# Altium PCB rs485_pcb.PcbDoc
Units mm, origin at the board's own origin, x right, y up, seen from the top; angles counter-clockwise.
Board outline 175 x 76 mm, 4 copper layers (Top Layer, GND, POWER, Bottom Layer), stack 1.54 mm thick; 49 components, 32 nets, 200 pads, 28 vias.
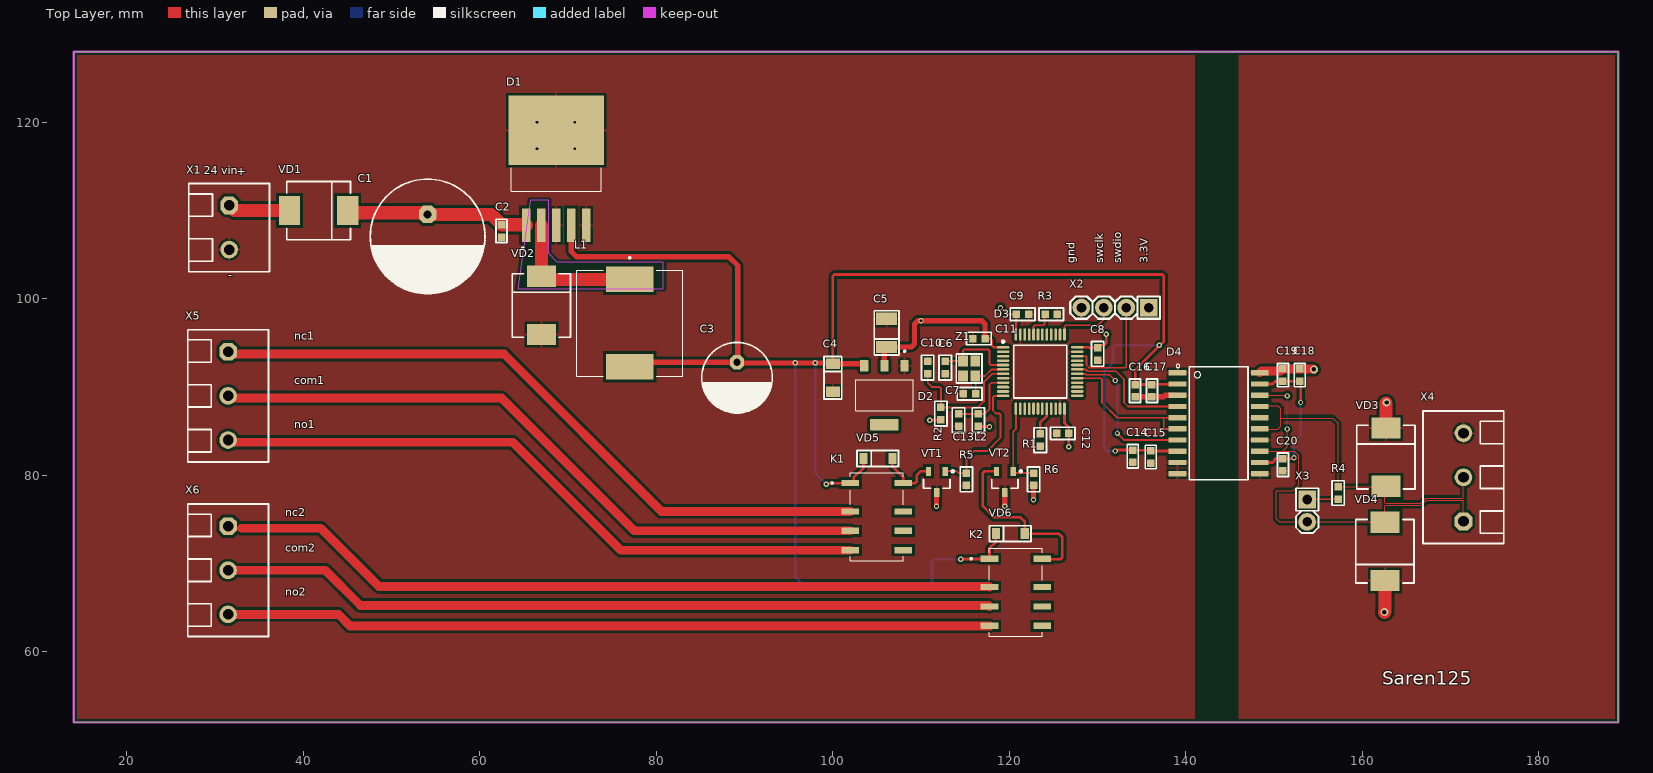
[diagram p0: Top Layer view]
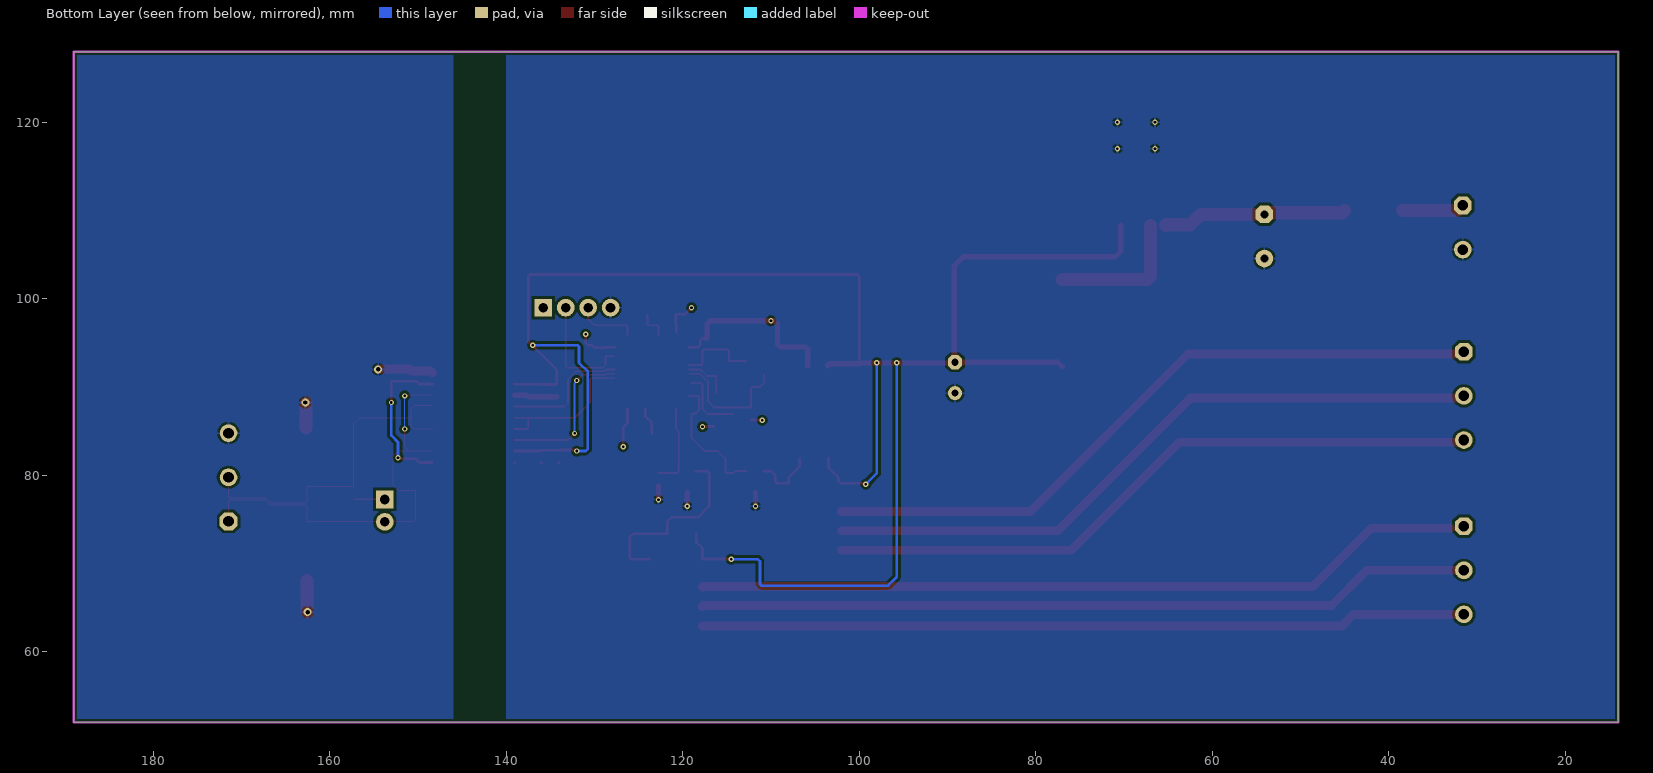
[diagram p1: Bottom Layer view, seen from below]
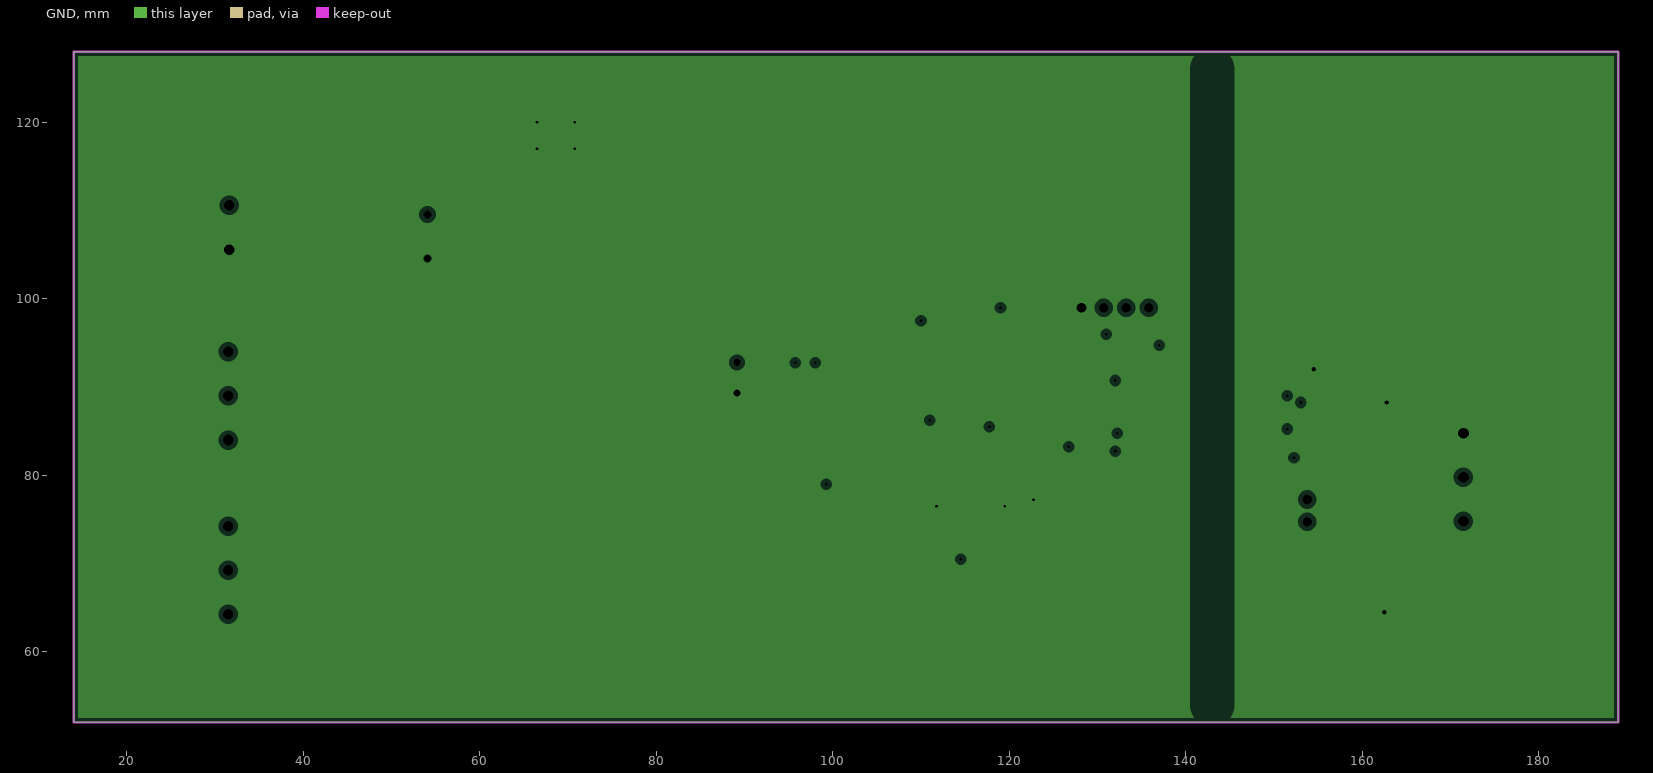
[diagram p2: GND, clearances drawn from the general rule]
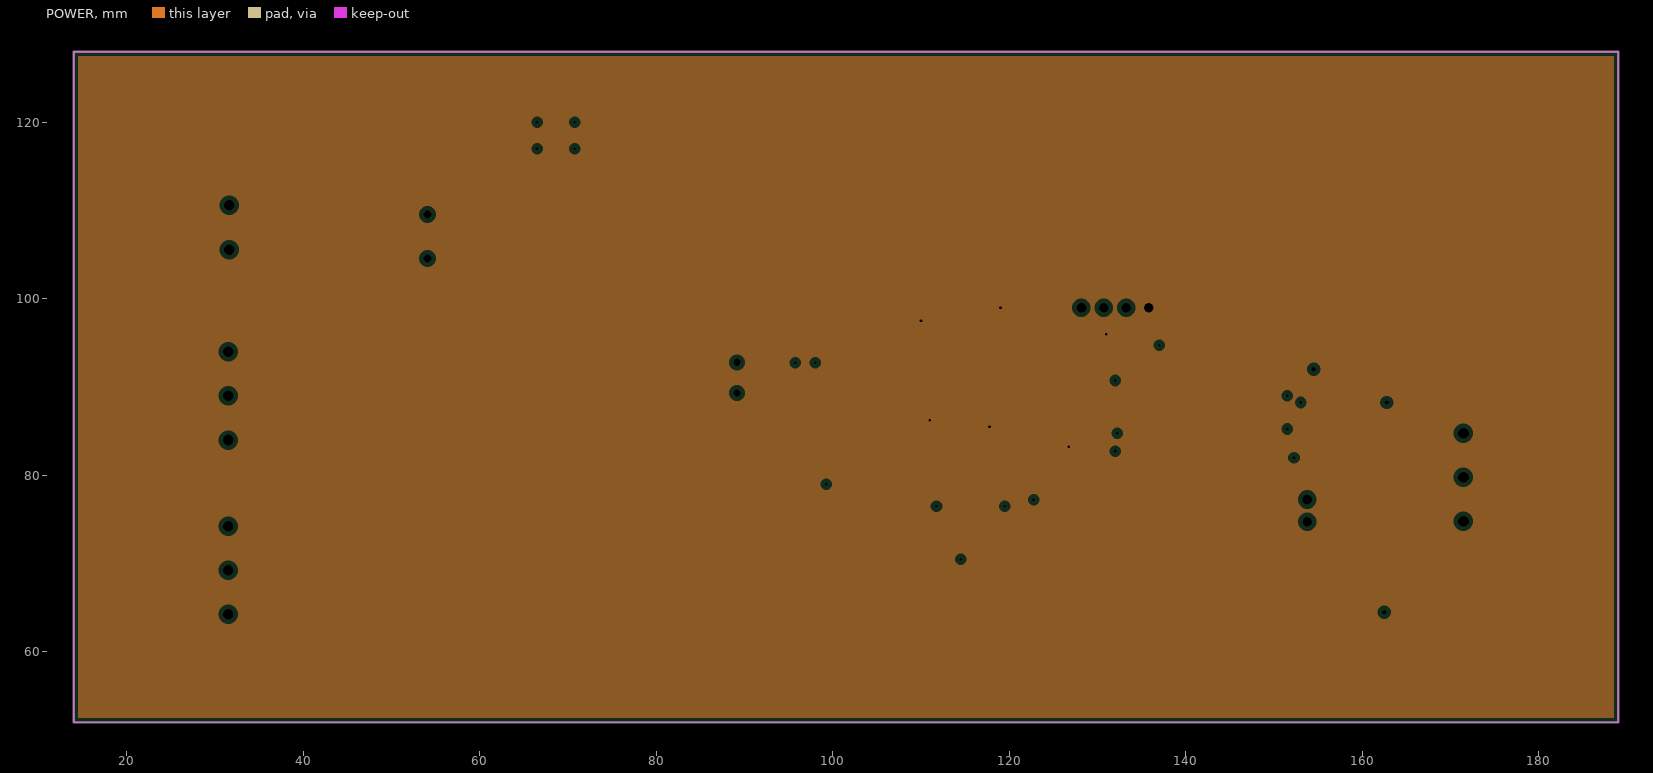
[diagram p3: POWER, clearances drawn from the general rule]
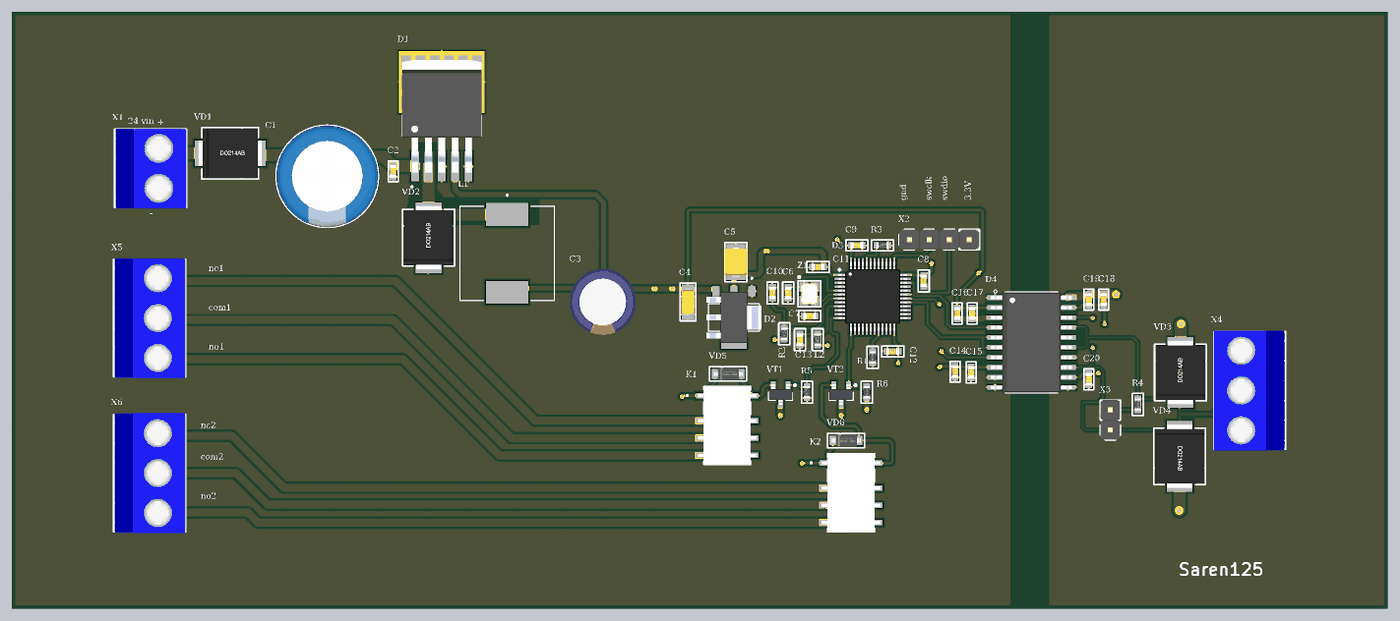
[diagram p4: 3D render of the assembled board from above, using the file's embedded part models]

## Layer stack, top to bottom
Top Solder: solder mask 0.0102, Solder Resist, Dk 3.5
Top Layer: signal copper 0.035
Dielectric 2: prepreg 0.2, PP-006, Dk 4.1
GND: plane copper 0.035, net (Multiple Nets)
Dielectric 1: dielectric 1, FR-4, Dk 4.8
POWER: plane copper 0.035, net +3.3V
Dielectric 3: prepreg 0.2, PP-006, Dk 4.1
Bottom Layer: signal copper 0.035
Bottom Solder: solder mask 0.0102, Solder Resist, Dk 3.5

## Board outline
14,52 14,128 189,128 189,52

## Design rules (kind name [scope] priority, off if disabled: settings)
Clearance Clearance_3 [InPolygon] p1: gap=0.3 ignorepadtopadclearanceinfootprint=FALSE
Clearance Clearance_2 [InNetClass('SIGNAL')] p2: gap=0.2 ignorepadtopadclearanceinfootprint=FALSE
Clearance Clearance_1 [InNetClass('POWER_DIGITAL')] p3: gap=0.2 ignorepadtopadclearanceinfootprint=FALSE
Clearance [InNetClass('POWER_24V_RELAY')] p4: gap=0.4 ignorepadtopadclearanceinfootprint=FALSE
DiffPairsRouting [InDifferentialPair('RS_485')] p1: maxlimit=0.127 minlimit=0.127 mostfreqgap=0.127 toplayer_minwidth=0.105 toplayer_maxwidth=0.105 toplayer_prefwidth=0.105 bottomlayer_minwidth=0.105 bottomlayer_maxwidth=0.105 bottomlayer_prefwidth=0.105 impedanceprofiledriven=TRUE impedanceprofileid={13D60385-229B-4DF7-BB78-969C6A2D73E0} impedanceprofilevalue=120.000000 maxuncoupledlength=12.7
MinimumSolderMaskSliver [All] p1: minsoldermaskwidth=0.1
PlaneClearance [All] p1: clearance=0.508
PlaneConnect [All] p1: planeconnectstyle=Relief reliefexpansion=0.508 reliefentries=4 reliefconductorwidth=0.254 reliefairgap=0.254
PolygonConnect [All] p1: connectstyle=Relief reliefconductorwidth=0.254 reliefentries=4 polygonreliefangle="90 Angle" airgapwidth=0.254
RoutingVias RoutingVias_2 [InNetClass('SIGNAL')] p1: holewidth=0.3 width=0.6 viastyle="Through Hole" minholewidth=0.3 minwidth=0.6 maxholewidth=0.3 maxwidth=0.6
RoutingVias RoutingVias_1 [InNetClass('POWER_DIGITAL')] p2: holewidth=0.3 width=0.6 viastyle="Through Hole" minholewidth=0.3 minwidth=0.6 maxholewidth=0.3 maxwidth=0.6
RoutingVias [InNetClass('POWER_24V_RELAY')] p3: holewidth=0.5 width=0.9 viastyle="Through Hole" minholewidth=0.5 minwidth=0.9 maxholewidth=0.5 maxwidth=0.9
SilkToSolderMaskClearance [IsPad] p1: minsilkscreentomaskgap=0.1 clearancetoexposedcopper=TRUE
SolderMaskExpansion [All] p1: expansion=0.102 istentingtop=FALSE
Width Width_2 [InNetClass('POWER_24V_RELAY')] p1: maxlimit=1.5 minlimit=1 preferedwidth=1
Width Width_1 [InNetClass('SIGNAL')] p2: maxlimit=0.3 minlimit=0.2 preferedwidth=0.2
Width [InNetClass('POWER_DIGITAL')] p3: maxlimit=0.6 minlimit=0.3 preferedwidth=0.4
25 further rules are at their usual default settings.

## Classes and differential pairs
component class power: 3 C1 C2 C3 C4 C5 C6 C7 C8 C9 C10 C11 C12 C13 D2 D3 L1 L2 R1 R2 VD1 VD2 X1 X2 Z1
component class interface: C14 C15 C16 C17 C18 C19 C20 D4 K1 K2 R4 R5 R6 VD3 VD4 VD5 VD6 VT1 VT2 X3 X4 X5 X6
net class SIGNAL: MCU_RX MCU_TX NetD1_2 NetD3_20 NetD3_44 NetK1_8 NetK2_8 OSC_IN OSC_OUT RELAY1_CTRL RELAY2_CTRL RS_485_DIR RS_485_N RS_485_P SWCLK SWDIO VDDA
net class POWER_DIGITAL: +3.3V +5V GND V_ISO
net class POWER_24V_RELAY: +24V COM1 COM2 GND_ISO NC1 NC2 NetD1_2 NO1 NO2
differential pair RS_485: +RS_485_P -RS_485_N

## Components (designator, comment, footprint, x,y, rotation, side; value= is the part's Value field where it differs from the comment)
C1 "JRB1H681M05001300200000B" "CAP: D13C5H20" 54.102,107.061 r270 top value="680 uF"
C2 "Ceramic capacitor, 0.1μF, X7R, ±10%, 50V, 0603, -55...+125°C" "CAP: 0603" 62.484,107.696 r90 top value=0.1μF
C3 "JRB1E221M03500800120000B" "CAP: D8C3.5H12" 89.154,91.059 r270 top value=220μF
C4 "Tantalum capacitor, 10μF, 10V, ±10%, 2Ohm, case A (3216), -55...+125°C" "CAP: TANTAL-A" 100.008,91.059 r270 top value=10μF
C5 "Tantalum capacitor, 22μF, 10V, ±10%, 1.2Ohm, case B (3528), -55...+125°C" "CAP: TANTAL-B" 106.104,96.139 r90 top value=22μF
C6 "22pF" CH0603C 112.75,92.2 r90 top
C7 "22pF" CH0603C 115.5,89.25 r180 top
C8 "0.1 uF" CH0603C 130,93.75 r90 top
C9 "0.1 uF" CH0603C 121.5,98.25 r180 top
C10 "0.1 uF" CH0603C 110.75,92.2 r270 top
C11 "0.1 uF" CH0603C 116.55,95.5 r0 top
C12 "0.1 uF" CH0603C 126.054,84.75 r0 top
C13 "0.1 uF" CH0603C 114.25,86.25 r90 top
C14 "Ceramic capacitor, 0.1μF, X7R, ±10%, 16V, 0603, -55...+125°C" "CAP: 0603" 133.996,82.167 r90 top value=0.1μF
C15 "Ceramic capacitor, 0.1μF, X7R, ±10%, 16V, 0603, -55...+125°C" "CAP: 0603" 136.028,82.084 r90 top value=0.1μF
C16 "Ceramic capacitor, 0.01μF, X7R, ±10%, 16V, 0603, -55...+125°C" "CAP: 0603" 134.25,89.589 r90 top value=0.01μF
C17 "Ceramic capacitor, 0.01μF, X7R, ±10%, 16V, 0603, -55...+125°C" "CAP: 0603" 136.155,89.589 r90 top value=0.01μF
C18 "Ceramic capacitor, 10uF, X7R, ±10%, 16V, 0603, -55...+125°C" "CAP: 0603" 152.907,91.359 r270 top value=10uF
C19 "Ceramic capacitor, 0.1μF, X7R, ±10%, 16V, 0603, -55...+125°C" "CAP: 0603" 151.002,91.359 r270 top value=0.1μF
C20 "Ceramic capacitor, 0.1μF, X7R, ±10%, 16V, 0603, -55...+125°C" "CAP: 0603" 151.002,81.199 r90 top value=0.1μF
D1 "LM2596S-5.0" TO170P1524X483-6N 68.678,114.731 r90 top
D2 "AMS1117-3.3" SOT229P700X180-4N 105.85,89.07 r270 top
D3 "STM32F103C8T6" 48-LQFP 123.5,91.75 r0 top
D4 "ADM2587EBRWZ-REEL7" SOIC127P1032X265-20N 143.714,85.898 r0 top
K1 "IM03GR" RELAY_IM03GR 105,75.321 r0 top
K2 "IM03GR" RELAY_IM03GR 120.75,66.75 r0 top
L1 "SPRH127-470M" IND_SPRH127-470M 77,97.25 r270 top
L2 "" CH0603R 116.5,86.25 r90 top
R1 "10 кОм" CH0603R 123.5,84 r270 top
R2 "10 кОм" CH0603R 112.25,87 r270 top
R3 "10 кОм" CH0603R 124.754,98.25 r0 top
R4 "120 Om" CH0603R 157.25,78 r270 top
R5 "10 kOm" CH0603R 115.146,79.552 r90 top
R6 "10 kOm" CH0603R 122.75,79.552 r90 top
VD1 "SS34" SMC 41.75,110 r0 top
VD2 "SS34" SMC 67,99.25 r90 top
VD3 "SMCJ12CA" SMC 162.669,82.064 r90 top
VD4 "SMCJ12CA" SMC 162.563,71.396 r270 top
VD5 "1N4148W" SOD123 106.75,81.9 r180 top
VD6 "1N4148W" SOD123 121.75,73.4 r180 top
VT1 "2N7002" SOT23_132 111.791,79.25 r270 top
VT2 "2N7002" SOT23_132 119.5,79.25 r270 top
X1 "KLS2-300-5.00-02P-2S" "CON: 300-02P-5.0" 31.623,108.077 r270 top
X2 "DS-1021-1x4" "CON: PLS-4" 131.98,99 r180 top
X3 "Connector, 2pin, 2.54mm, 500VAC, 3A" "CON: PLS-2" 153.75,76 r270 top
X4 "KLS2-300-5.00-02P-2S" "CON: 300-03P-5.0" 171.453,79.778 r90 top
X5 "KLS2-300-5.00-02P-2S" "CON: 300-03P-5.0" 31.5,89 r270 top
X6 "KLS2-300-5.00-02P-2S" "CON: 300-03P-5.0" 31.5,69.25 r270 top
Z1 "8MHz" "OSC: 2520" 114.75,92.95 r270 top

## Footprints (in the part's own frame and the unit in brackets; to place one, negate y for a bottom-side part, rotate by r counter-clockwise, add the part's x,y. Pads: shape width x height; smd on the part's side, far side on the other; paste and mask are expansions set on the pad)
48-LQFP [mm] "QFP, 48-Leads, Body 7x7mm, Pitch 0.5mm, IPC Medium Density"
  oval 1.4x0.3 smd: 1(-4.2,2.75) 2(-4.2,2.25) 3(-4.2,1.75) 4(-4.2,1.25) 5(-4.2,0.75) 6(-4.2,0.25) 7(-4.2,-0.25) 8(-4.2,-0.75) 9(-4.2,-1.25) 10(-4.2,-1.75) 11(-4.2,-2.25) 12(-4.2,-2.75) 25(4.2,-2.75) 26(4.2,-2.25) 27(4.2,-1.75) 28(4.2,-1.25) 29(4.2,-0.75) 30(4.2,-0.25) 31(4.2,0.25) 32(4.2,0.75) 33(4.2,1.25) 34(4.2,1.75) 35(4.2,2.25) 36(4.2,2.75)
  round 0.5 on Mech1: 2(-4,4)
  oval 0.3x1.4 smd: 13(-2.75,-4.2) 14(-2.25,-4.2) 15(-1.75,-4.2) 16(-1.25,-4.2) 17(-0.75,-4.2) 18(-0.25,-4.2) 19(0.25,-4.2) 20(0.75,-4.2) 21(1.25,-4.2) 22(1.75,-4.2) 23(2.25,-4.2) 24(2.75,-4.2) 37(2.75,4.2) 38(2.25,4.2) 39(1.75,4.2) 40(1.25,4.2) 41(0.75,4.2) 42(0.25,4.2) 43(-0.25,4.2) 44(-0.75,4.2) 45(-1.25,4.2) 46(-1.75,4.2) 47(-2.25,4.2) 48(-2.75,4.2)
  silkscreen extent -4.32,-3 3,3.52, body extent -4.39,-4.39 4.39,4.39, height 1.55
"CAP: 0603" [mm]
  rect 0.85x0.85 smd: 1(-0.7,0) 2(0.7,0)
  silkscreen extent -1.33,-0.63 1.33,0.63, body extent -0.8,-0.4 0.8,0.4, height 0.3
"CAP: D8C3.5H12" [mm]
  oct 1.6x1.6 hole 0.8: 1(-1.75,0)
  round 1.6 hole 0.8: 2(1.75,0)
  silkscreen extent -4,-4 4,4, body extent -4.25,-4.25 4.25,4.25, height 13
"CAP: D13C5H20" [mm]
  oct 2x2 hole 0.9: 1(-2.5,0)
  round 2 hole 0.9: 2(2.5,0)
  silkscreen extent -6.5,-6.5 6.5,6.5, body extent -6.5,-6.5 6.5,6.5, height 25
"CAP: TANTAL-A" [mm]
  rect 1.2x1.6 smd: 1(-1.6,0) 2(1.6,0)
  silkscreen extent -2.4,-1 2.4,1, body extent -1.7,-0.84 1.7,0.84, height 1.71
"CAP: TANTAL-B" [mm]
  rect 1.4x2.4 smd: 1(-1.6,0) 2(1.6,0)
  silkscreen extent -2.5,-1.4 2.5,1.4, body extent -1.85,-1.46 1.85,1.47, height 2.03
CH0603C [mm] "Chip Capacitor, 2-Leads, Body 1,53x0,85mm, IPC Medium Density"
  rect 0.85x0.85 smd: 1(-0.7,0) 2(0.7,0)
  silkscreen extent -1.4,-0.7 1.4,0.7, body extent -0.8,-0.4 0.8,0.4, height 0.3
CH0603R [mm]
  rect 0.85x0.85 smd: 1(-0.7,0) 2(0.7,0)
  silkscreen extent -1.4,-0.7 1.4,0.7, body extent -0.8,-0.4 0.8,0.4, height 0.44
"CON: 300-02P-5.0" [mm] "2 pin 5.08mm screw connector"
  oct 2x2 hole 1.2: 1(-2.5,0)
  round 2 hole 1.2: 2(2.5,0)
  round 0.5 on Mech1: 13(-4.4,-3.9)
  silkscreen extent -5,-4.57 5,4.57, body extent -5.08,-4.44 5.08,4.56, height 12.5
"CON: 300-03P-5.0" [mm] "3 pin 5.08mm screw connector"
  oct 2x2 hole 1.2: 1(-5,0)
  round 2 hole 1.2: 2(0,0) 3(5,0)
  round 0.5 on Mech1: 11(-6.7,-3.7)
  silkscreen extent -7.5,-4.57 7.5,4.57, body extent -7.62,-4.44 7.62,4.56, height 12.5
"CON: PLS-2" [mm]
  rect 2x2 hole 1.1: 1(-1.27,0)
  round 2 hole 1.1: 2(1.27,0)
  silkscreen extent -2.54,-1.27 2.54,1.27, body extent -2.57,-1.28 2.51,1.26, height 8.54
"CON: PLS-4" [mm] "PLS-40 4 pin header"
  rect 2x2 hole 1.1: 1(-3.81,0)
  round 2 hole 1.1: 2(-1.27,0) 3(1.27,0) 4(3.81,0)
  silkscreen extent -5.08,-1.27 5.08,1.27, body extent -5.08,-1.27 5.08,1.27, height 8.54
IND_SPRH127-470M [mm]
  rect 2.9x5.4 smd paste+0 mask+0.102: 1(-4.95,0) 2(4.95,0)
  silkscreen extent -7.5,-6 6,6
"OSC: 2520" [mm]
  rect 1.2x1.1 smd: 1(0,0) 2(1.7,0) 3(1.7,1.4) 4(0,1.4)
  round 0.5 on Mech1: 5(-0.075,0.025)
  round 0.5 on Top Overlay: 6(-1.275,-0.6)
  silkscreen extent -0.8,-0.75 2.5,2.15, body extent -0.45,-0.35 2.15,1.75, height 0.55
RELAY_IM03GR [mm]
  rect 2x0.7 smd paste+0 mask+0.102: 1(-3,3.8) 2(-3,0.6) 3(-3,-1.6) 4(-3,-3.8) 5(3,-3.8) 6(3,-1.6) 7(3,0.6) 8(3,3.8)
  silkscreen extent -5.18,-5 3,5, body extent -3.75,-5 3.75,5, height 5.85
SMC [mm]
  rect 2.4x3.3 smd: 1(-3.3,0) 2(3.3,0)
  silkscreen extent -3.6,-3.3 3.6,3.3, body extent -4.06,-3.15 4.06,3.15, height 2.67
SOD123 [mm]
  rect 0.91x1.22 smd: 1(0,0) 2(3.275,0)
  round 0.5 on Mech1: 4(3,0.4)
  silkscreen extent -0.7,-0.9 4,0.9, body extent -0.25,-0.8 3.45,0.8, height 1.25
SOIC127P1032X265-20N [mm]
  rect 2x0.6 smd: 1(-4.65,5.715) 2(-4.65,4.445) 3(-4.65,3.175) 4(-4.65,1.905) 5(-4.65,0.635) 6(-4.65,-0.635) 7(-4.65,-1.905) 8(-4.65,-3.175) 9(-4.65,-4.445) 10(-4.65,-5.715) 11(4.65,-5.715) 12(4.65,-4.445) 13(4.65,-3.175) 14(4.65,-1.905) 15(4.65,-0.635) 16(4.65,0.635) 17(4.65,1.905) 18(4.65,3.175) 19(4.65,4.445) 20(4.65,5.715)
  silkscreen extent -4.8,-6.4 3.32,6.7, body extent -5.16,-6.4 5.16,6.4, height 2.65
SOT23_132 [mm] "SOT23, 3-Leads, Body 3,0x2,6mm (max), Pitch 0,95mm, IPC Medium Density"
  rect 1x0.6 smd: 1(-1.2,0.95) 2(-1.2,-0.95) 3(1.2,0)
  round 0.5 on Mech1: ""(-0.9,1.1)
  silkscreen extent -1.32,-1.5 0.7,1.92, body extent -1.32,-1.52 1.32,1.52, height 1.12
SOT229P700X180-4N [mm]
  rrect15% 1.31x0.93 smd: 1(-3.345,2.29) 2(-3.345,0) 3(-3.345,-2.29)
  rrect15% 1.31x3.24 smd: 4(3.345,0)
  silkscreen extent -5.1,-3.25 1.75,3.25, body extent -3.25,-3.5 3.25,3.5, height 1.8
TO170P1524X483-6N [mm]
  rect 3.79x0.99 smd: 1(-6.4,3.4) 2(-6.4,1.7) 3(-6.4,0) 4(-6.4,-1.7) 5(-6.4,-3.4)
  rect 7.88x10.84 smd paste-6: 6(4.35,0)
  silkscreen extent -9.1,-5.08 0.09,5.08, body extent -7.18,-5.08 7.18,5.08, height 4.65

## Part data
C1: library part Aluminium, Manufacturer=Wurth, Package="14x10x5 mm", PartNumber=860080475013, Temperature=-55...+105°C, Tolerance=±20%, TypeCapacitor="Aluminium capacitor", ValueManufacturerPartNumber="Aluminium capacitor, 680 uF, 50V, ±20%, 54mOhm, 14x10x5 mm, -55...+105°C", Voltage=50V, HelpURL=https://www.digikey.com/product-detail/en/wurth-electronics-inc/860080475013/732-9029-1-ND/5728972, Impedance=54mOhm
C2: library part Ceramic_0603, Manufacturer=Yageo, Package=0603, PartNumber=CC0603KRX7R7BB104, Temperature=-55...+125°C, Tolerance=±10%, TypeCapacitor="Ceramic capacitor", TypeDielectric=X7R, Voltage=50V, HelpURL=https://www.digikey.com/product-detail/en/yageo/CC0603KRX7R7BB104/311-1088-1-ND/302998, ValueManufacturerPartNumber="Ceramic capacitor, 0.1μF, X7R, ±10%, 50V, 0603, -55...+125°C"
C3: library part Aluminium, Manufacturer=Wurth, Package="14x10x5 mm", PartNumber=860080475013, Temperature=-55...+105°C, Tolerance=±20%, TypeCapacitor="Aluminium capacitor", ValueManufacturerPartNumber="Aluminium capacitor, 220μF, 25V, ±20%, 54mOhm, 14x10x5 mm, -55...+105°C", Voltage=25V, HelpURL=https://www.digikey.com/product-detail/en/wurth-electronics-inc/860080475013/732-9029-1-ND/5728972, Impedance=54mOhm
C4: library part Tantal_A, Manufacturer=AVX, Package="case A (3216)", PartNumber=F930J107KAAAJ6, Temperature=-55...+125°C, Tolerance=±10%, TypeCapacitor="Tantalum capacitor", TypeDielectric=X7R, Voltage=10V, HelpURL=https://www.digikey.com/product-detail/en/avx-corporation/F930J107KAAAJ6/478-12404-1-ND/9645231, Impedance=2Ohm, ValueManufacturerPartNumber="Tantalum capacitor, 10μF, 10V, ±10%, 2Ohm, case A (3216), -55...+125°C"
C5: library part Tantal_B, Manufacturer=AVX, Package="case B (3528)", PartNumber=F930J227KBA, Temperature=-55...+125°C, Tolerance=±10%, TypeCapacitor="Tantalum capacitor", TypeDielectric=X7R, Voltage=10V, HelpURL=https://www.digikey.com/product-detail/en/avx-corporation/F930J227KBA/478-8166-1-ND/4005570, Impedance=1.2Ohm, ValueManufacturerPartNumber="Tantalum capacitor, 22μF, 10V, ±10%, 1.2Ohm, case B (3528), -55...+125°C"
C6 C7 C8 C9 C10 C11 C12 C13: library part Capacitor
C14 C15 C16 C17 C18 C19 C20: library part Ceramic_0603, Manufacturer=Yageo, Package=0603, PartNumber=CC0603KRX7R7BB104, Temperature=-55...+125°C, Tolerance=±10%, TypeCapacitor="Ceramic capacitor", TypeDielectric=X7R, Voltage=16V, HelpURL=https://www.digikey.com/product-detail/en/yageo/CC0603KRX7R7BB104/311-1088-1-ND/302998
  C14 C15 C19 C20: ValueManufacturerPartNumber="Ceramic capacitor, 0.1μF, X7R, ±10%, 16V, 0603, -55...+125°C"
  C16 C17: ValueManufacturerPartNumber="Ceramic capacitor, 0.01μF, X7R, ±10%, 16V, 0603, -55...+125°C"
  C18: ValueManufacturerPartNumber="Ceramic capacitor, 10uF, X7R, ±10%, 16V, 0603, -55...+125°C"
D1: "SIMPLE SWITCHERÂ® 4.5V to 40V, 3A Low Component Count Step-Down Regulator", Package="TO-263-5 Texas Instruments", Check_prices=https://www.snapeda.com/parts/LM2596S-5.0/NOPB/Texas+Instruments/view-part/?ref=eda, MF="Texas Instruments", MP=LM2596S-5.0/NOPB, SnapEDA_Link=https://www.snapeda.com/parts/LM2596S-5.0/NOPB/Texas+Instruments/view-part/?ref=snap
D2: "Sot223/Pkg 1-Amp 3.3-Volt Low Drop Out Voltage Regulatator", Package="SOT-223 Seeed Technology", Check_prices=https://www.snapeda.com/parts/AMS1117-3.3/Advanced+Monolithic+Systems/view-part/?ref=eda, MF="Advanced Monolithic Systems", MP=AMS1117-3.3, SnapEDA_Link=https://www.snapeda.com/parts/AMS1117-3.3/Advanced+Monolithic+Systems/view-part/?ref=snap
D3: "Cortex-M3", Manufacturer="ST Microelectronics", ComponentKind=48-LQFP, HelpURL=https://www.digikey.com/product-detail/en/stmicroelectronics/STM32F103C8T6/497-6063-ND/1646338, Model=STM32F103C8T6
D4: "2.5 kV Signal and Power Isolated, Â±15 kV ESD Protected, Full/Half Duplex RS-485 Transceiver (500kbps)", Package="SOIC -20 Analog Devices", Check_prices=https://www.snapeda.com/parts/ADM2587EBRWZ-REEL7/Analog+Devices/view-part/?ref=eda, MF="Analog Devices", MP=ADM2587EBRWZ-REEL7, SnapEDA_Link=https://www.snapeda.com/parts/ADM2587EBRWZ-REEL7/Analog+Devices/view-part/?ref=snap
K1 K2: "Signal Relay 5VDC 2A DPDT( (10mm 7.5mm 5.65mm)) SMD Medical", Package=None, Check_prices=https://www.snapeda.com/parts/IM03GR/TE+Connectivity/view-part/?ref=eda, MF="TE Connectivity", MP=IM03GR, SnapEDA_Link=https://www.snapeda.com/parts/IM03GR/TE+Connectivity/view-part/?ref=snap
L1: Package=None, Availability=Unavailable, MF="{'manufacturer': u'CODACA'}", MP=SPRH127-470M, Price=None
L2: library part Bead
R1 R2 R3 R4 R5 R6: library part Resistor
VD1 VD2: library part "Diod Schottky"
VD3 VD4: library part TVS-diod
VD5 VD6: library part Diod
VT1 VT2: library part N-chanel, "Mosfet"
X1: library part 2-Connector
X2: library part 4-Connector
X3: library part PLS-2, CurrentMax=3A, Manufacturer=Connfly, VoltageMax=500VAC, CommentText=DS1021-1x2, HelpURL=https://www.chipdip.ru/product/pls-2, Multichannel=2pin, PartNumber=PLS-2, Pitch=2.54mm, TypeConnector=Connector, ValueManufacturerPartNumber="Connector, 2pin, 2.54mm, 500VAC, 3A"
X4 X5 X6: library part 3-Connector
Z1: library part Oscillator

## Via types
v1: diameter 0.6, hole 0.3, Top Layer to Bottom Layer, 25 vias
v2: diameter 0.9, hole 0.5, Top Layer to Bottom Layer, 3 vias

## Nets (pads, with @x,y where several pads share a name; then routed paths per layer and width w, separated by ;. In a path a pad name is that pad's centre, name@x,y a point inside that pad or via, vN(x,y) a via of type N, cw(c..) or ccw(c..) an arc to the next point about the centre after c; other vN are vias at no path point)
+3.3V: C5.1 C8.2 C9.2 C11.2 C12.2 D2.2 D3.1 D3.24 D3.36 D3.48 L2.1 R2.2 X2.1 | length 36
  Top Layer w0.3: v1(111,86.25) 111.025,86.275 112.225,86.275 R2.2 ; L2.1 116.525,85.525 117.725,85.525 v1(117.75,85.5) ; C11.2@117.5,95.5 117.824,95.5 118,95.324 118,94.75 118.25,94.5 D3.1 ; v1(119,99) 119.75,98.25 C9.2 120.8,97.262 120.75,97.212 D3.48@120.75,96.25 ; D3.24 126.25,87 126.25,85.924 126.724,85.449 126.724,84.78 C12.2 126.752,84.748 v1(126.75,83.25) v1(126.75,83.25) ; D3.36 128.962,94.5 129.012,94.45 C8.2 130.275,94.725 130.725,94.725 131,95 v1(131,96)
  Top Layer w0.6: D2.2 105.85,94.285 C5.1 108.899,94.539 109.25,94.89 109.25,97.149 109.601,97.5 v1(110,97.5) 116.899,97.5 117.25,97.149 C11.2
+5V: C3.1 C4.1 C14.2 C15.2 C16.2 C17.2 D1.4 D2.3 D4.2 D4.8 K1.1 K2.1 L1.2 VD5.2 VD6.2 | length 225.2
  Top Layer w0.3: v1(99.25,79) 99.331,79 99.452,79.121 K1.1 102.167,79.121 102.367,79.321 102.367,79.745 103.475,80.853 VD5.2 ; C4.1@100,92.734 100,102.574 100.176,102.75 137.324,102.75 137.5,102.574 137.5,95.176 137.037,94.713 134.25,91.926 C16.2 C17.2 136.182,90.316 139.037,90.316 D4.2 ; v1(114.5,70.5) 114.525,70.525 117.725,70.525 K2.1 117.75,71.75 118.475,72.475 VD6.2 ; v1(132,82.75) 132.081,82.75 132.198,82.867 C14.2 134.037,82.826 135.986,82.826 C15.2 136.058,82.753 139.033,82.753 D4.8
  Top Layer w0.6: D1.4 70.378,105.372 71,104.75 88.25,104.75 89.25,103.75 C3.1@89.25,92.905 ; L1.2 77.509,92.809 C3.1 ; C3.1@89.154,92.734 95.75,92.734 98,92.734 99.933,92.734 C4.1 103.395,92.659 103.56,92.494 D2.3
  Bottom Layer w0.3: v1(95.75,92.75) 95.75,68.5 96.75,67.5 111.074,67.5 111.25,67.676 111.25,70.25 111.5,70.5 v1(114.5,70.5) ; v1(98,92.75) 98,80.25 v1(99.25,79) ; v1(132,82.75) 131,82.75 130.75,83 130.75,91.75 131.75,92.75 131.75,94.574 131.926,94.75 v1(137,94.75)
+24V: C1.1 C2.2 D1.1 VD1.2 | length 20.9
  Top Layer w1.5: VD1.2 45.3,109.75 53.913,109.75 C1.1 61.319,109.561 C2.2 65.213,108.396 D1.1
COM1: K1.3 X5.2 | length 76
  Top Layer w1: X5.2@32.25,88.75 62.5,88.75 77.529,73.721 K1.3
COM2: K2.3 X6.2 | length 87.2
  Top Layer w1: X6.2@32.25,69.25 42.5,69.25 46.5,65.25 117.65,65.25 K2.3
GND: C1.2 C2.1 C3.2 C4.2 C5.2 C6.1 C7.2 C8.1 C9.1 C10.1 C11.1 C12.1 C13.1 C14.1 C15.1 C16.1 C17.1 D1.3 D1.5 D1.6 D2.1 D3.8 D3.23 D3.35 D3.47 D4.1 D4.3 D4.9 D4.10 R1.2 R3.2 R5.1 R6.1 VD2.1 VT1.3 VT2.3 X1.2 X2.4 | length 9.9
  Top Layer w0.3: VT1.3@111.771,78.029 VT1.3 ; C14.1 C14.1@134.037,81.425 ; C15.1@135.986,81.425 C15.1 C15.1@136.062,81.418 ; D4.9@139.029,81.418 D4.9
  Top Layer w0.6: v1(111.75,76.5) 111.75,78.009 VT1.3 ; v1(119.5,76.5) VT2.3 ; v1(122.75,77.25) R6.1 ; C16.1 C17.1 137.48,88.889 137.664,89.073 D4.3
  other v1: 66.5,117 70.75,117 66.5,120 70.75,120
GND_ISO: C18.1 C19.1 C20.1 D4.11 D4.14 D4.16 D4.20 VD3.2 VD4.2 X4.3 | length 12.9
  Top Layer w1: D4.20 148.564,91.813 150.756,91.813 C19.1 C18.1 154.441,92.059 v2(154.5,92) ; v2@162.669,88.169 v2(162.75,88.25)
  Top Layer w1.5: v2(162.5,64.5) 162.563,64.563 VD4.2 ; VD3.2 v2@162.669,88.169
MCU_RX: D3.31 D4.4 | length 14.6
  Top Layer w0.2: D3.31 127.716,91.984 128.7,91.984 128.884,91.8 132.083,91.8 133,90.883 133,88.25 133.447,87.803 D4.4
MCU_TX: D3.30 D4.7 | length 17.9
  Top Layer w0.2: D3.30 128.619,91.5 128.719,91.4 131.35,91.4 v1(132,90.75) ; v1(132.25,84.75) 133.007,83.993 D4.7 D4.7@139.057,84
  Bottom Layer w0.2: v1(132,90.75) 132,90.683 132.25,90.433 v1(132.25,84.75)
NC1: K1.2 X5.1 | length 77.1
  Top Layer w1: X5.1@32.25,93.75 62.75,93.75 80.579,75.921 K1.2
NC2: K2.2 X6.1 | length 87.5
  Top Layer w1: 33,74 42,74 48.6,67.4 117.7,67.4 K2.2
NetD1_2: D1.2 L1.1 VD2.2 | length 15.9
  Top Layer w0.3: D1.2 D1.2@67,108.309 ; VD2.2 VD2.2@67.35,102.2
  Top Layer w1.5: VD2.2 D1.2@67,108.309 ; VD2.2@67.35,102.2 L1.1
NetD3_20: D3.20 R1.1 | length 3.2
  Top Layer w0.3: R1.1 123.5,86 124.25,86.75 D3.20
NetD3_44: D3.44 R3.1 | length 3.4
  Top Layer w0.2: D3.44 122.75,96.883 122.867,97 123.883,97 124,97.117 124,98.196 R3.1
NetK1_8: K1.8 VD5.1 VT1.2 | length 7.1
  Top Layer w0.3: VD5.1 106.75,80.997 108,79.747 K1.8 109.324,79.121 109.5,79.296 109.5,80 109.95,80.45 VT1.2
NetK2_8: K2.8 VD6.1 VT2.2 | length 21.3
  Top Layer w0.3: VT2.2 117.176,80.45 117,80.274 117,76.5 118.25,75.25 121.25,75.25 121.75,74.75 VD6.1 125.6,73.4 126,73 126,70.676 125.824,70.5 123.8,70.5 K2.8
NetR4_2: R4.2 X3.1 | length 3.5
  Top Layer w0.2: X3.1 153.78,77.3 R4.2
NetVD1_1: VD1.1 X1.1 | length 7.9
  Top Layer w0.3: VD1.1@37.873,110.577 VD1.1
  Top Layer w1.5: X1.1 31.684,110.577 32.261,110 VD1.1
NO1: K1.4 X5.3 | length 74.8
  Top Layer w1: X5.3@32.25,83.75 63.75,83.75 75.979,71.521 K1.4
NO2: K2.4 X6.3 | length 86.8
  Top Layer w1: X6.3 44,64.25 45.3,62.95 K2.4
NRST: C10.2 D3.7 R2.1 | length 14.8
  Top Layer w0.2: C10.2 110.75,90.5 111.25,90 112.133,90 112.25,89.883 R2.1 116.45,87.7 117.125,88.375 117.125,90.559 118.066,91.5 D3.7
OSC_IN: C6.2 D3.5 Z1.1 | length 9.4
  Top Layer w0.2: C6.2 112.8,92.95 Z1.1 114.75,94.133 114.867,94.25 116.941,94.25 117.633,94.25 117.75,94.133 117.75,92.617 117.867,92.5 D3.5
OSC_OUT: C7.1 D3.6 Z1.3 | length 5.5
  Top Layer w0.2: C7.1 116.2,91.2 Z1.3 117.25,91.25 118,92 D3.6
RELAY1_CTRL: D3.12 R5.2 VT1.1 | length 15.4
  Top Layer w0.2: VT1.1 112.791,80.5 114.003,80.5 114.252,80.252 R5.2 115.146,81.896 116,82.75 117.5,82.75 119,84.25 119,86.883 118.883,87 118.5,87 118.15,87.35 118.15,88.883 118.267,89 D3.12
RELAY2_CTRL: D3.13 R6.2 VT2.1 | length 9.6
  Top Layer w0.2: D3.13 120.75,85.25 120.45,84.95 VT2.1 120.648,80.252 R6.2
RS_485_DIR: D3.29 D4.5 D4.6 | length 17.5
  Top Layer w0.2: D3.29 130.383,91 130.5,90.883 130.5,88.25 132.217,86.533 137.5,86.533 ; D4.6 137.617,85.263 137.5,85.38 137.5,86.533 ; D4.5 137.5,86.533
RS_485_N: D4.13 D4.18 VD4.1 X3.2 X4.1 | length 49.4
  Top Layer w0.105: D4.13 150.973,82.723 ; D4.18 151.427,89.073 v1(151.5,89) ; v1(151.5,85.25) 151.5,83.25 150.973,82.723 ; X4.1 171.453,77.1 171.391,77.162 167.262,77.162 166.714,76.614 162.625,76.614 162.563,76.552 VD4.1 162.529,74.73 X3.2 150.582,74.73 150.25,75.062 150.25,78.186 150.312,78.247 152.186,78.247 152.803,78.864 152.803,82.229 152.309,82.723 150.973,82.723
  Bottom Layer w0.105: v1(151.5,85.25) v1(151.5,89)
RS_485_P: D4.15 D4.17 R4.1 VD3.1 X4.2 | length 39.7
  Top Layer w0.105: D4.15 148.377,85.25 150.438,85.25 150.753,85.564 150.753,86.486 ; D4.17 148.446,87.885 150.438,87.885 150.753,87.571 150.753,86.486 ; X4.2 171.453,77.456 171.391,77.394 167.166,77.394 166.618,76.846 162.625,76.846 162.563,76.908 162.563,78.764 162.499,78.7 R4.1 157.25,85.878 156.642,86.486 150.753,86.486
SWCLK: D3.37 X2.3 | length 7
  Top Layer w0.2: D3.37 126.25,96.883 126.367,97 130,97 130.7,97.7 130.7,98.99 X2.3
SWDIO: D3.34 X2.2 | length 13.4
  Top Layer w0.2: D3.34 128.714,93.5 128.75,93.464 128.75,92.5 129.05,92.2 133.133,92.2 133.25,92.317 X2.2
V_ISO: C18.2 C19.2 C20.2 D4.12 D4.19 | length 17.9
  Top Layer w0.3: D4.19 149.843,90.343 150.159,90.659 C19.2 C18.2 153,90.566 v1(153,88.25) ; D4.12@148.385,81.474 D4.12 149.824,81.453 150,81.629 150,81.723 150.176,81.899 C20.2 152.068,81.899 152.169,82 v1(152.25,82)
  Bottom Layer w0.3: v1(152.25,82) 152.25,83.75 153,84.5 v1(153,88.25)
VDDA: C13.2 D3.9 L2.2 | length 7.9
  Top Layer w0.2: C13.2 L2.2 117.2,86.95 117.75,87.5 117.75,90.25 118,90.5 118.75,90.5 118.8,90.45 D3.9@119,90.45
pads on no net: D2.4 D3.2 D3.3 D3.4 D3.10 D3.11 D3.14 D3.15 D3.16 D3.17 D3.18 D3.19 D3.21 D3.22 D3.25 D3.26 D3.27 D3.28 D3.32 D3.33 D3.38 D3.39 D3.40 D3.41 D3.42 D3.43 D3.45 D3.46 K1.5 K1.6 K1.7 K2.5 K2.6 K2.7 VD5.4 VD6.4 VT1. VT2. X1.13 X4.11 X5.11 X6.11 Z1.2 Z1.4 Z1.5 Z1.6

## Polygon pours and split planes (outlines as drawn)
GND on Top Layer "GND_L01_P004" (solid, pour order 4): 14,128 141,128 141,52 14,52
GND_ISO on Top Layer "GND_ISO_L01_P002" (solid, pour order 2): 146,128 189,128 189,52 146,52
GND_ISO on Bottom Layer "GND_ISO_L04_P003" (solid, pour order 3): 189,128 146,128 146,52 189,52
GND on Bottom Layer "GND_L04_P001" (solid, pour order 1): 14,128 140,128 140,52 14,52
GND on GND (split plane): 140.95,127.435 140.833,127.251 140.732,127.058 140.649,126.856 140.583,126.648 140.536,126.435 140.507,126.218 140.498,126 140.498,54 140.507,53.782 140.536,53.565 140.583,53.352 140.649,53.144 140.732,52.942 140.833,52.749 140.95,52.565 140.992,52.51 14.51,52.51 14.51,127.49 140.992,127.49
GND_ISO on GND (split plane): 188.49,52.51 145.008,52.51 145.05,52.565 145.167,52.749 145.268,52.942 145.351,53.144 145.417,53.352 145.464,53.565 145.493,53.782 145.502,54 145.502,126 145.493,126.218 145.464,126.435 145.417,126.648 145.351,126.856 145.268,127.058 145.167,127.251 145.05,127.435 145.008,127.49 188.49,127.49
+3.3V on POWER (split plane): 188.49,52.51 14.51,52.51 14.51,127.49 188.49,127.49

## Keep-outs
Top Layer:
  region: 65,104
  region: 64.306,101.14 80.814,101.14 80.814,104.14 68.814,104.14 67.814,105.14 67.814,111.14 65.734,111.14
Keep-Out Layer:
  the board outline again, w0.254

## Other copper
GND (plane layer: these items are gaps in the copper):
  lines w5: 143,54 143,126

## Silkscreen, mask and mechanical layers (free items; w line width, h text height)
Top Overlay:
  text "24 vin" at 28.751,113.75 h1.52
  text "+" at 32.5,113.67 h1.52
  text "swclk" at 131,104.001 h1.52 r90
  text "swdio" at 133,104.001 h1.52 r90
  text "3.3V" at 136,104.001 h1.52 r90
  text "gnd" at 127.759,104 h1.52 r90
  text "-" at 31.5,101.957 h1.52
  text "nc1" at 39,95 h1.52
  text "com1" at 39,90 h1.52
  text "no1" at 39,85 h1.52
  text "nc2" at 38,75 h1.52
  text "com2" at 38,71 h1.52
  text "no2" at 38,66 h1.52
  text "Saren125" at 162.254,56.254 h1.52